# EAGLE board driver_copy (EAGLE 9.5.2)
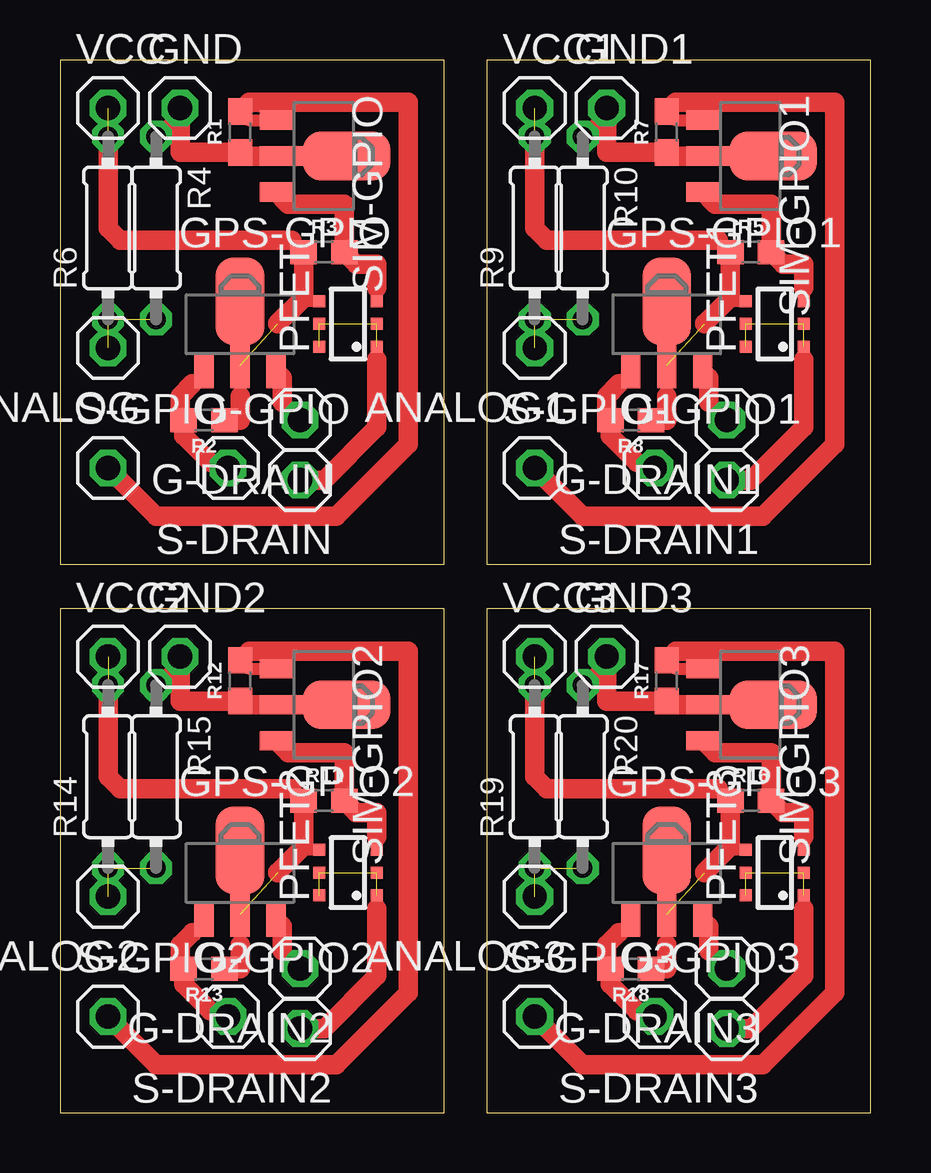
[diagram p0: board, top side]

Size 33.78 x 43.86 mm. Coordinates in mm from the lower left corner, seen from the top.
Outline: 0,22.86 16,22.86 16,43.86 0,43.86 0,22.86
Outline: 17.78,22.86 33.78,22.86 33.78,43.86 17.78,43.86 17.78,22.86
Outline: 0,0 16,0 16,21 0,21 0,0
Outline: 17.78,0 33.78,0 33.78,21 17.78,21 17.78,0
Copper layers (1*16): Top 0.035mm / dielectric 1.5mm / Bottom 0.035mm
Design rules "default": minimum track width 6mil, minimum drill 0.35mm, track to track 6mil, track to pad 6mil, pad to pad 6mil, via to via 6mil, smd to smd 6mil, copper to edge 40mil, drill to drill 6mil, minimum pad ring 10mil, minimum via ring 8mil, stop-mask expansion 4mil, vias tented up to drill 0mil, thermal gap 10mil

## Footprints (pad centres in the part's own frame; a part is rotated, then mirrored left to right if it is on the bottom)
1X01 = drill 1.016 octagon: 1 0,0
SOT89 = smd 0.8 x 1.4: 1 -1.499,-1.981; 3 1.499,-1.981 | smd 0.8 x 1.9: 2 0,-1.727 | smd 2.032 x 3.65: 2@1 0,0.94
SC74_INFINEON = smd 0.5 x 0.5: 1 -0.95,-1.2; 2 0,-1.2; 3 0.95,-1.2; 4 0.95,1.2; 5 0,1.2; 6 -0.95,1.2
0603 = smd 1.1 x 1: 1 -0.85,0; 2 0.85,0
0204/7 = drill 0.813 octagon: 1 -3.81,0; 2 3.81,0

## Placement (x,y rotation side)
ANALOG  [1X01]  2,31.86 180 top
ANALOG1  [1X01]  19.78,31.86 180 top
ANALOG2  [1X01]  2,9 180 top
ANALOG3  [1X01]  19.78,9 180 top
G-DRAIN  [1X01]  10,28.86 180 top
G-DRAIN1  [1X01]  27.78,28.86 180 top
G-DRAIN2  [1X01]  10,6 180 top
G-DRAIN3  [1X01]  27.78,6 180 top
G-GPIO  [1X01]  7,26.86 0 top
G-GPIO1  [1X01]  24.78,26.86 0 top
G-GPIO2  [1X01]  7,4 0 top
G-GPIO3  [1X01]  24.78,4 0 top
GND  [1X01]  5,41.86 0 top
GND1  [1X01]  22.78,41.86 0 top
GND2  [1X01]  5,19 0 top
GND3  [1X01]  22.78,19 0 top
GPS-GPIO  [SOT89]  7.5,32.86 0 top
GPS-GPIO1  [SOT89]  25.28,32.86 0 top
GPS-GPIO2  [SOT89]  7.5,10 0 top
GPS-GPIO3  [SOT89]  25.28,10 0 top
PFET  BSL207SP  [SC74_INFINEON]  12,32.86 90 top
PFET1  BSL207SP  [SC74_INFINEON]  29.78,32.86 90 top
PFET2  BSL207SP  [SC74_INFINEON]  12,10 90 top
PFET3  BSL207SP  [SC74_INFINEON]  29.78,10 90 top
R1  1k  [0603]  7.5,40.86 90 top
R2  1k  [0603]  6,28.86 180 top
R3  10k  [0603]  11,35.86 0 top
R4  68k  [0204/7]  4,36.86 270 top
R5  10k  [0603]  28.78,35.86 0 top
R6  47k  [0204/7]  2,36.86 90 top
R7  1k  [0603]  25.28,40.86 90 top
R8  1k  [0603]  23.78,28.86 180 top
R9  47k  [0204/7]  19.78,36.86 90 top
R10  68k  [0204/7]  21.78,36.86 270 top
R11  10k  [0603]  11,13 0 top
R12  1k  [0603]  7.5,18 90 top
R13  1k  [0603]  6,6 180 top
R14  47k  [0204/7]  2,14 90 top
R15  68k  [0204/7]  4,14 270 top
R16  10k  [0603]  28.78,13 0 top
R17  1k  [0603]  25.28,18 90 top
R18  1k  [0603]  23.78,6 180 top
R19  47k  [0204/7]  19.78,14 90 top
R20  68k  [0204/7]  21.78,14 270 top
S-DRAIN  [1X01]  10,26.36 180 top
S-DRAIN1  [1X01]  27.78,26.36 180 top
S-DRAIN2  [1X01]  10,3.5 180 top
S-DRAIN3  [1X01]  27.78,3.5 180 top
S-GPIO  [1X01]  2,26.86 0 top
S-GPIO1  [1X01]  19.78,26.86 0 top
S-GPIO2  [1X01]  2,4 0 top
S-GPIO3  [1X01]  19.78,4 0 top
SIM-GPIO  [SOT89]  11,39.86 270 top
SIM-GPIO1  [SOT89]  28.78,39.86 270 top
SIM-GPIO2  [SOT89]  11,17 270 top
SIM-GPIO3  [SOT89]  28.78,17 270 top
VCC  [1X01]  2,41.86 0 top
VCC1  [1X01]  19.78,41.86 0 top
VCC2  [1X01]  2,19 0 top
VCC3  [1X01]  19.78,19 0 top

## Library data of the parts
ANALOG ANALOG1-ANALOG3 G-DRAIN G-DRAIN1-G-DRAIN3 G-GPIO G-GPIO1-G-GPIO3 GND GND1-GND3 S-DRAIN S-DRAIN1-S-DRAIN3 S-GPIO S-GPIO1-S-GPIO3 VCC VCC1-VCC3 = pinhead
GPS-GPIO GPS-GPIO1-GPS-GPIO3 SIM-GPIO SIM-GPIO1-SIM-GPIO3 = semicon-smd-ipc
PFET PFET1-PFET3 = transistor-fet
R1-R3 R5 R7 R8 R11-R13 R16-R18 = SparkFun-Resistors; PROD_ID: RES-00824
R4 R6 R9 R10 R14 R15 R19 R20 = resistor

## Nets
ANALOG: ANALOG.1 R4.2 R6.1
ANALOG1: ANALOG1.1 R9.1 R10.2
ANALOG2: ANALOG2.1 R14.1 R15.2
ANALOG3: ANALOG3.1 R19.1 R20.2
N$1: PFET.3 R3.2 SIM-GPIO.3
N$2: G-GPIO.1 GPS-GPIO.1 R2.2
N$3: GPS-GPIO.2 PFET.4 R2.1 R3.1 R6.2 VCC.1
N$4: R1.2 S-GPIO.1 SIM-GPIO.1
N$5: G-DRAIN.1 GPS-GPIO.3
N$6: PFET.1 PFET.2 PFET.5 PFET.6 S-DRAIN.1
N$7: GND.1 R1.1 R4.1 SIM-GPIO.2
N$8: PFET1.3 R5.2 SIM-GPIO1.3
N$9: R7.2 S-GPIO1.1 SIM-GPIO1.1
N$10: G-GPIO1.1 GPS-GPIO1.1 R8.2
N$11: G-DRAIN1.1 GPS-GPIO1.3
N$12: PFET1.1 PFET1.2 PFET1.5 PFET1.6 S-DRAIN1.1
N$13: GPS-GPIO1.2 PFET1.4 R5.1 R8.1 R9.2 VCC1.1
N$14: GND1.1 R7.1 R10.1 SIM-GPIO1.2
N$15: PFET2.3 R11.2 SIM-GPIO2.3
N$16: R12.2 S-GPIO2.1 SIM-GPIO2.1
N$17: G-GPIO2.1 GPS-GPIO2.1 R13.2
N$18: G-DRAIN2.1 GPS-GPIO2.3
N$19: PFET2.1 PFET2.2 PFET2.5 PFET2.6 S-DRAIN2.1
N$20: GPS-GPIO2.2 PFET2.4 R11.1 R13.1 R14.2 VCC2.1
N$21: GND2.1 R12.1 R15.1 SIM-GPIO2.2
N$22: PFET3.3 R16.2 SIM-GPIO3.3
N$23: R17.2 S-GPIO3.1 SIM-GPIO3.1
N$24: G-GPIO3.1 GPS-GPIO3.1 R18.2
N$25: G-DRAIN3.1 GPS-GPIO3.3
N$26: PFET3.1 PFET3.2 PFET3.5 PFET3.6 S-DRAIN3.1
N$27: GPS-GPIO3.2 PFET3.4 R16.1 R18.1 R19.2 VCC3.1
N$28: GND3.1 R17.1 R20.1 SIM-GPIO3.2

## Tracks (layer width: path | path; a pad name or v marks a point on that pad's centre or on a via)
ANALOG  (2 unrouted)
ANALOG1  (2 unrouted)
ANALOG2  (2 unrouted)
ANALOG3  (2 unrouted)
N$1
  Top 0.508: 13.2,34.36 PFET.3
  Top 0.813: SIM-GPIO.3 9.52,37.86 11.85,37.86 R3.2 12.35,35.36 13.2,35.36 13.2,34.36
N$2  (via drill 0.35)
  Top 0.508: GPS-GPIO.1 6,30.86 5.5,30.36 | 5,29.01 R2.2 | G-GPIO.1 6.5,26.86 6.25,27.11
  Top 0.813: 5.5,30.36 5,29.86 5,29.01 | R2.2 5.15,28.21 6.25,27.11
  other vias: 7,26.86
N$3  (2 unrouted)
  Top 0.508: 9.65,36.36 R3.1 | PFET.4 10,33.81 | 10,33.81 9.87,33.81 9.42,33.36 | GPS-GPIO.2 7.5,29.86 | 7.5,28.86 R2.1 | 10.15,33.96 10,33.81
  Top 0.813: R6.2 2,36.86 2.5,36.36 9.65,36.36 | R3.1 10.15,33.96 9.07,32.89 9.07,32.86 | 7.5,29.86 7.5,28.86
N$4
  Top 0.508: SIM-GPIO.1 7.85,41.36 R1.2 7.5,41.86 | 2.25,26.61 S-GPIO.1
  Top 0.813: R1.2 7.88,42.09 14.5,42.09 14.5,27.86 11.5,24.86 4,24.86 2.25,26.61
N$5
  Top 0.508: 9.25,29.61 G-DRAIN.1
  Top 0.813: GPS-GPIO.3 9.25,30.63 9.25,29.61
N$6  (3 unrouted)
  Top 0.508: 13.2,31.36 PFET.1
  Top 0.813: S-DRAIN.1 11,26.36 13.2,28.56 13.2,31.36
N$7
  Top 0.508: GND.1 5,41.67 R4.1 | 7,40.01 R1.1 | 9,39.86 SIM-GPIO.2
  Top 0.813: GND.1 5,40.01 7,40.01 | R1.1 7.65,39.86 9,39.86
N$8
  Top 0.508: 30.98,34.36 PFET1.3
  Top 0.813: SIM-GPIO1.3 27.3,37.86 29.63,37.86 R5.2 30.13,35.36 30.98,35.36 30.98,34.36
N$9
  Top 0.508: SIM-GPIO1.1 25.63,41.36 R7.2 25.28,41.86 | 20.03,26.61 S-GPIO1.1
  Top 0.813: R7.2 25.66,42.09 32.28,42.09 32.28,27.86 29.28,24.86 21.78,24.86 20.03,26.61
N$10  (via drill 0.35)
  Top 0.508: GPS-GPIO1.1 23.78,30.86 23.28,30.36 | 22.78,29.01 R8.2 | G-GPIO1.1 24.28,26.86 24.03,27.11
  Top 0.813: 23.28,30.36 22.78,29.86 22.78,29.01 | R8.2 22.93,28.21 24.03,27.11
  other vias: 24.78,26.86
N$11
  Top 0.508: 27.03,29.61 G-DRAIN1.1
  Top 0.813: GPS-GPIO1.3 27.03,30.63 27.03,29.61
N$12  (3 unrouted)
  Top 0.508: 30.98,31.36 PFET1.1
  Top 0.813: S-DRAIN1.1 28.78,26.36 30.98,28.56 30.98,31.36
N$13  (2 unrouted)
  Top 0.508: 27.43,36.36 R5.1 | PFET1.4 27.78,33.81 | 27.78,33.81 27.65,33.81 27.2,33.36 | GPS-GPIO1.2 25.28,29.86 | 25.28,28.86 R8.1 | 27.93,33.96 27.78,33.81
  Top 0.813: R9.2 19.78,36.86 20.28,36.36 27.43,36.36 | R5.1 27.93,33.96 26.85,32.89 26.85,32.86 | 25.28,29.86 25.28,28.86
N$14
  Top 0.508: GND1.1 22.78,41.67 R10.1 | 24.78,40.01 R7.1 | 26.78,39.86 SIM-GPIO1.2
  Top 0.813: GND1.1 22.78,40.01 24.78,40.01 | R7.1 25.43,39.86 26.78,39.86
N$15
  Top 0.508: 13.2,11.5 PFET2.3
  Top 0.813: SIM-GPIO2.3 9.52,15 11.85,15 R11.2 12.35,12.5 13.2,12.5 13.2,11.5
N$16
  Top 0.508: SIM-GPIO2.1 7.85,18.5 R12.2 7.5,19 | 2.25,3.75 S-GPIO2.1
  Top 0.813: R12.2 7.88,19.23 14.5,19.23 14.5,5 11.5,2 4,2 2.25,3.75
N$17  (via drill 0.35)
  Top 0.508: GPS-GPIO2.1 6,8 5.5,7.5 | 5,6.15 R13.2 | G-GPIO2.1 6.5,4 6.25,4.25
  Top 0.813: 5.5,7.5 5,7 5,6.15 | R13.2 5.15,5.35 6.25,4.25
  other vias: 7,4
N$18
  Top 0.508: 9.25,6.75 G-DRAIN2.1
  Top 0.813: GPS-GPIO2.3 9.25,7.77 9.25,6.75
N$19  (3 unrouted)
  Top 0.508: 13.2,8.5 PFET2.1
  Top 0.813: S-DRAIN2.1 11,3.5 13.2,5.7 13.2,8.5
N$20  (2 unrouted)
  Top 0.508: 9.65,13.5 R11.1 | PFET2.4 10,10.95 | 10,10.95 9.87,10.95 9.42,10.5 | GPS-GPIO2.2 7.5,7 | 7.5,6 R13.1 | 10.15,11.1 10,10.95
  Top 0.813: R14.2 2,14 2.5,13.5 9.65,13.5 | R11.1 10.15,11.1 9.07,10.03 9.07,10 | 7.5,7 7.5,6
N$21
  Top 0.508: GND2.1 5,18.81 R15.1 | 7,17.15 R12.1 | 9,17 SIM-GPIO2.2
  Top 0.813: GND2.1 5,17.15 7,17.15 | R12.1 7.65,17 9,17
N$22
  Top 0.508: 30.98,11.5 PFET3.3
  Top 0.813: SIM-GPIO3.3 27.3,15 29.63,15 R16.2 30.13,12.5 30.98,12.5 30.98,11.5
N$23
  Top 0.508: SIM-GPIO3.1 25.63,18.5 R17.2 25.28,19 | 20.03,3.75 S-GPIO3.1
  Top 0.813: R17.2 25.66,19.23 32.28,19.23 32.28,5 29.28,2 21.78,2 20.03,3.75
N$24  (via drill 0.35)
  Top 0.508: GPS-GPIO3.1 23.78,8 23.28,7.5 | 22.78,6.15 R18.2 | G-GPIO3.1 24.28,4 24.03,4.25
  Top 0.813: 23.28,7.5 22.78,7 22.78,6.15 | R18.2 22.93,5.35 24.03,4.25
  other vias: 24.78,4
N$25
  Top 0.508: 27.03,6.75 G-DRAIN3.1
  Top 0.813: GPS-GPIO3.3 27.03,7.77 27.03,6.75
N$26  (3 unrouted)
  Top 0.508: 30.98,8.5 PFET3.1
  Top 0.813: S-DRAIN3.1 28.78,3.5 30.98,5.7 30.98,8.5
N$27  (2 unrouted)
  Top 0.508: 27.43,13.5 R16.1 | PFET3.4 27.78,10.95 | 27.78,10.95 27.65,10.95 27.2,10.5 | GPS-GPIO3.2 25.28,7 | 25.28,6 R18.1 | 27.93,11.1 27.78,10.95
  Top 0.813: R19.2 19.78,14 20.28,13.5 27.43,13.5 | R16.1 27.93,11.1 26.85,10.03 26.85,10 | 25.28,7 25.28,6
N$28
  Top 0.508: GND3.1 22.78,18.81 R20.1 | 24.78,17.15 R17.1 | 26.78,17 SIM-GPIO3.2
  Top 0.813: GND3.1 22.78,17.15 24.78,17.15 | R17.1 25.43,17 26.78,17